# Altium PCB FU-AM-FU6861-B-025-HW-V1.0-20210601.pcbdoc (part 1 of 2)
Units mil, origin at the board's own origin, x right, y up, seen from the top; angles counter-clockwise.
Board outline 6000 x 4000 mil, 2 copper layers (Top Layer, Bottom Layer); 124 components, 51 nets, 325 pads, 278 vias.
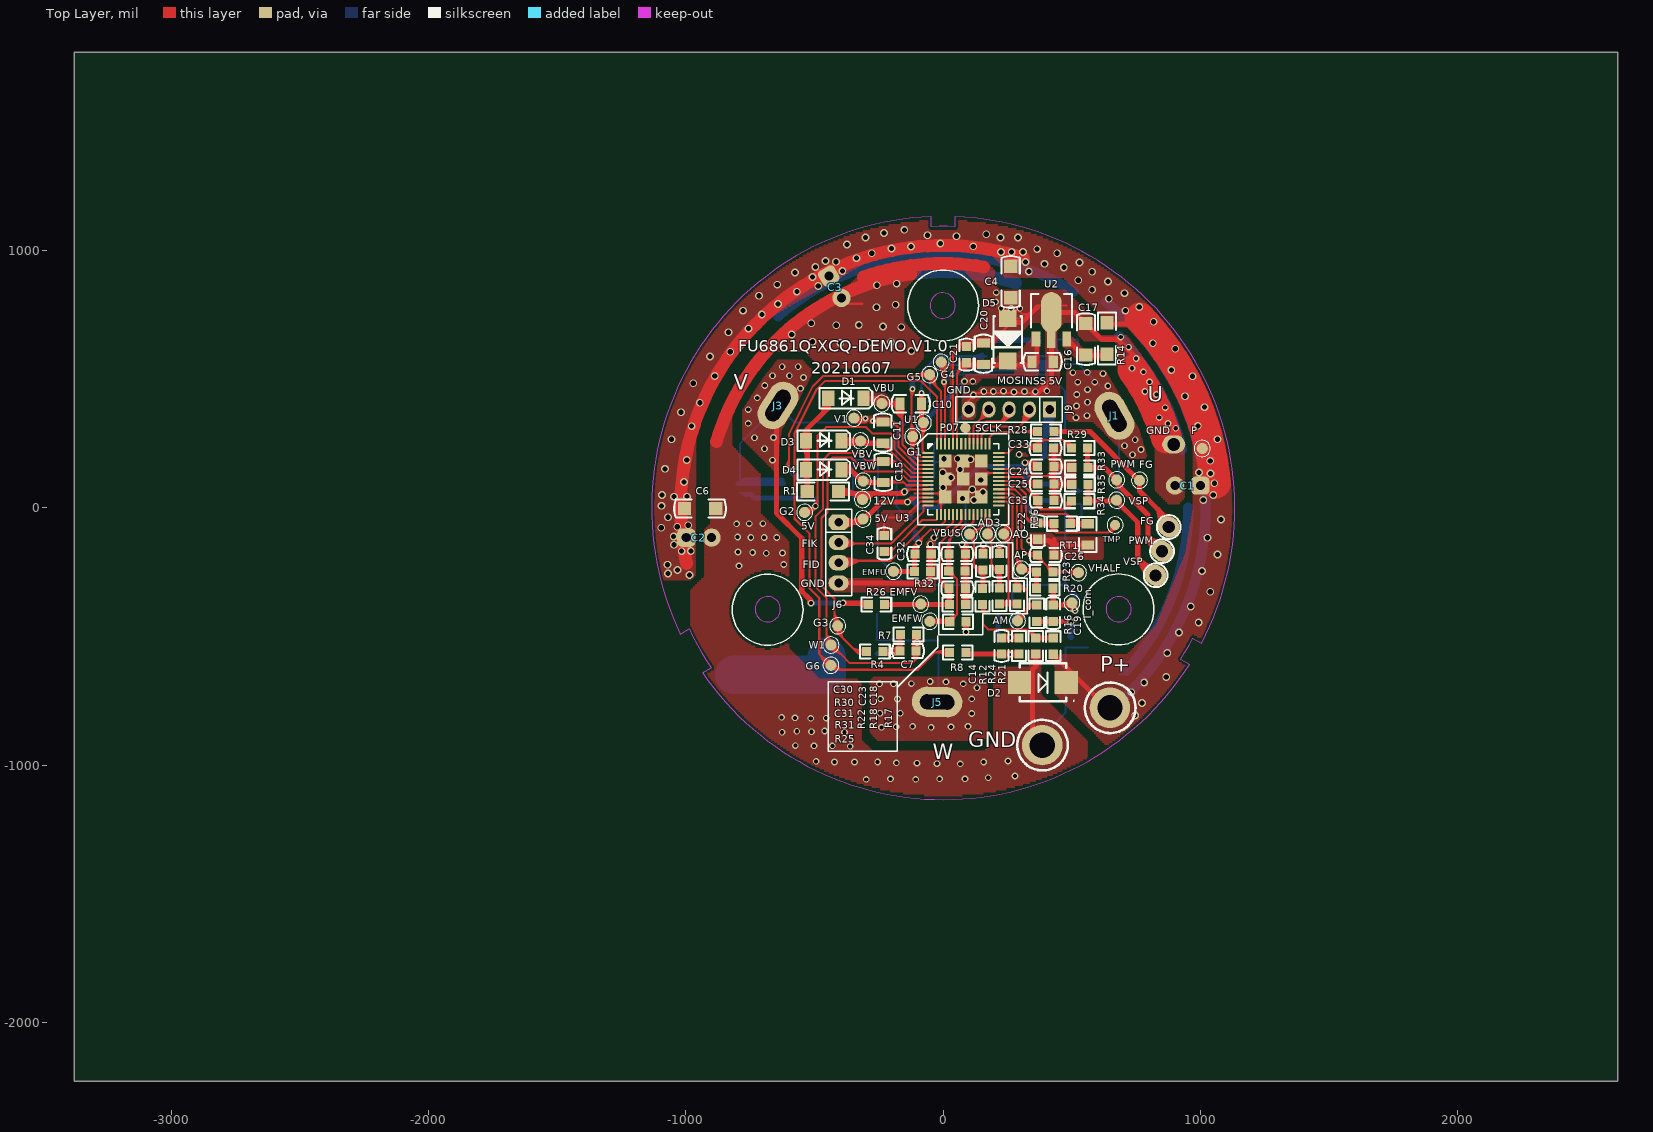
[diagram p0: Top Layer view]
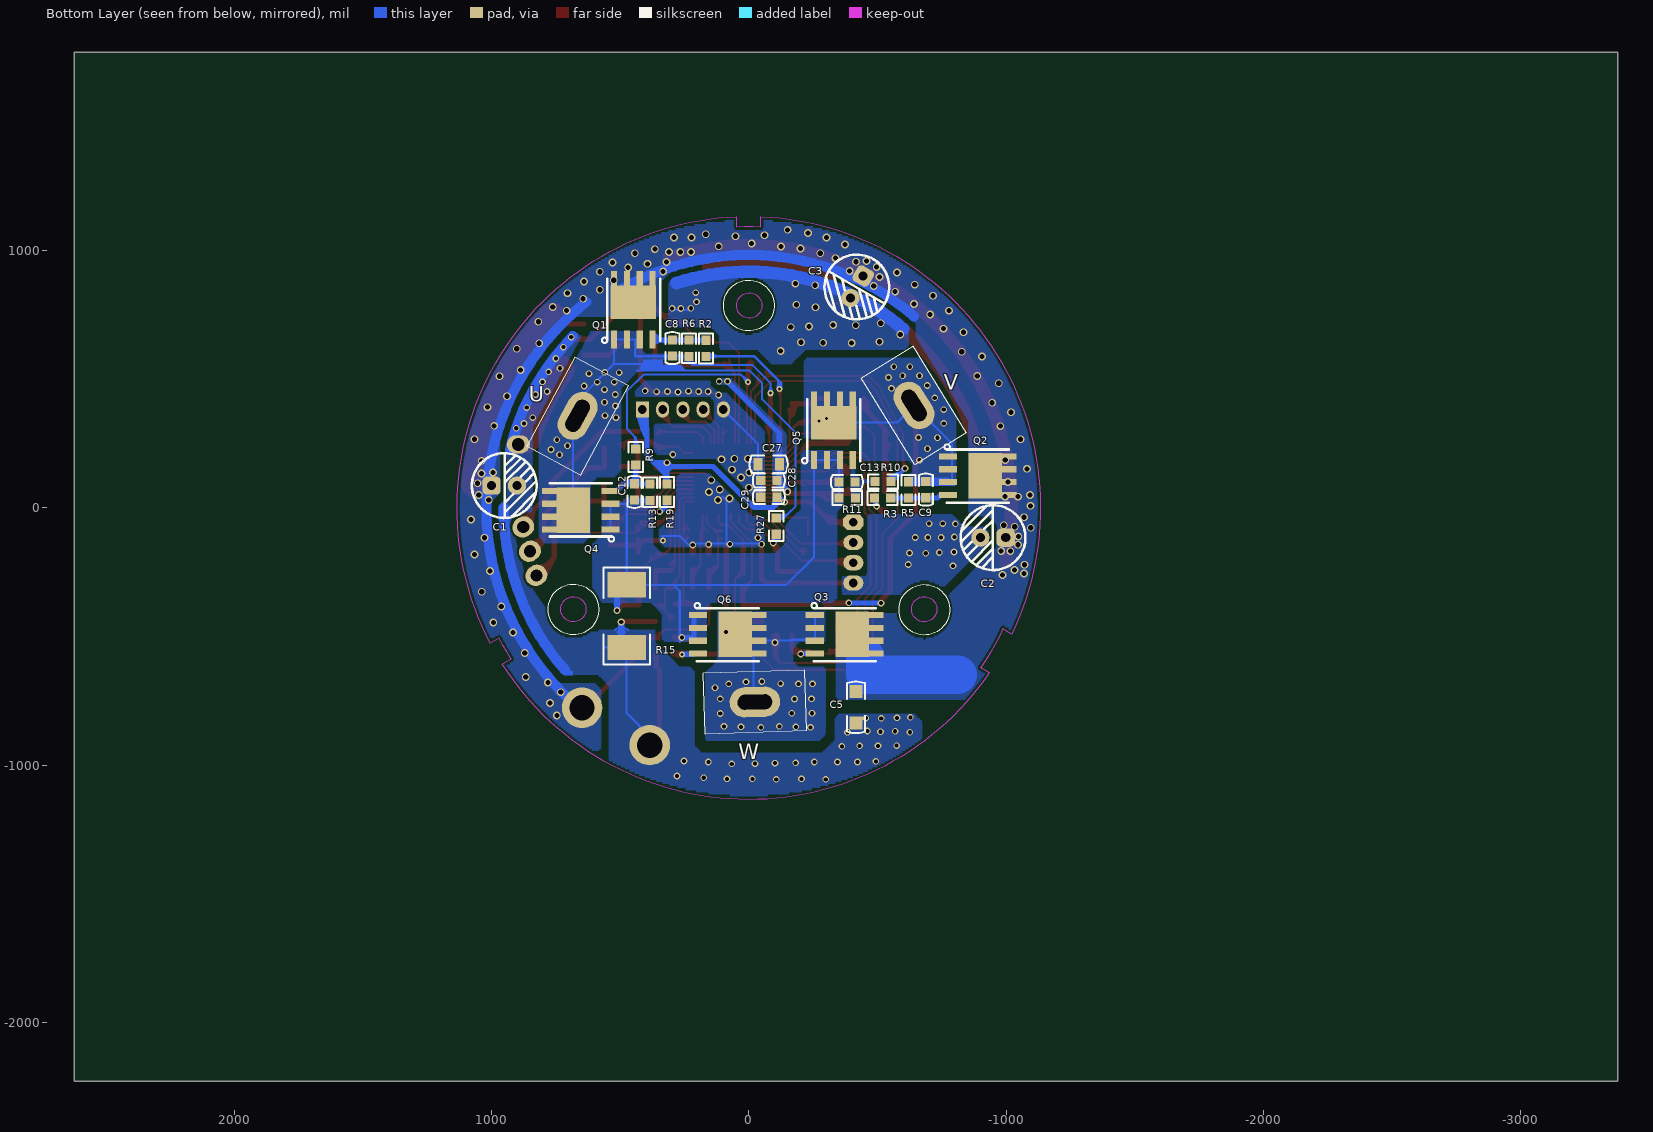
[diagram p1: Bottom Layer view, seen from below]

## Layer stack, top to bottom
Top Solder: solder mask 0.4, Solder Resist, Dk 3.5
Top Layer: signal copper 1.4
Dielectric1: dielectric 12.6, FR-4, Dk 4.8
Bottom Layer: signal copper 1.4
Bottom Solder: solder mask 0.4, Solder Resist, Dk 3.5

## Board outline
-3377.94,-2228.66 2622.06,-2228.66 2622.06,1771.34 -3377.94,1771.34

## Design rules (kind name [scope] priority, off if disabled: settings)
Clearance [All] p1: gap=7 ignorepadtopadclearanceinfootprint=FALSE except(0: Arc-Hole Track-Hole SMDPad-Hole THPad-Hole Via-Hole Fill-Hole Poly-Hole Region-Hole Text-Hole)
HoleToHoleClearance [All] p1: gap=7 allowstackedmicrovias=TRUE
MinimumSolderMaskSliver [All] p1: minsoldermaskwidth=4
PolygonConnect [All] p1: connectstyle=Direct reliefconductorwidth=10 reliefentries=4 polygonreliefangle="90 Angle" airgapwidth=10
RoutingVias [All] p1: holewidth=28 width=50 viastyle="Through Hole" minholewidth=28 minwidth=50 maxholewidth=28 maxwidth=50
SilkToSilkClearance [All] p1: silktosilkclearance=0
SilkToSolderMaskClearance SilkscreenOverComponentPads [IsPad] p1: minsilkscreentomaskgap=0 clearancetoexposedcopper=TRUE
SolderMaskExpansion [All] p1: expansion=4 istentingtop=FALSE
Width [All] p1: maxlimit=300 minlimit=7 preferedwidth=20
26 further rules are at their usual default settings.

## Components (designator, comment, footprint, x,y, rotation, side; value= is the part's Value field where it differs from the comment)
5V "" TP1.1#1 -311.91,-42.83 r0 top
12V "" TP1.1#1 -313.59,32.89 r90 top
AD3 "" TP1.1#1 171.84,-100.85 r90 top
AM "" TP1.1#1 288.7,-438.53 r0 top
AO "" TP1.1#1 235.14,-100.85 r0 top
AP "" TP1.1#1 304.76,-237.74 r0 top
C1 "180uF/35V" CAP2_5 953.19,86.06 r30 top locked
C2 "180uF/35V" CAP2_5 -952.32,-114.72 r210 top locked
C3 "180uF/35V" CAP2_5 -420.83,861.65 r150 top locked
C4 "CT106/50V" c1206 262.42,818.45 r90 top
C5 "CT106/50V" c1206 -416.39,-835.09 r90 bottom
C6 "CT106/50V" c1206 -885.38,-2.21 r180 top
C7 "1nf/50V" c0603 -107.04,-556.05 r180 top
C8 "1nf/50V" C0603 297.14,591.67 r90 bottom
C9 "1nf/50V" C0603 -687.99,100.93 r270 bottom
C10 "CT106/25V" c0805 -86.14,404.87 r180 top
C11 "CT106/25V" c0805 -234.27,332.89 r270 top
C12 "1nf/50V" c0603 443.81,32.82 r90 bottom
C13 "1nf/50V" C0603 -351.69,100.33 r180 bottom
C14 "1nf/50V" C0603 226.79,-506.72 r270 top
C15 "CT106/25V" c0805 -232.89,179.81 r270 top
C16 "106/25V" C0805 426.57,568.32 r180 top
C17 "105/50V" c1206 554.27,595.99 r90 top
C18 "105/16V" c0603 219.43,-238.42 r90 top
C19 "101/16V" c0603 427.61,-439.2 r90 top
C20 "106/25V" c0805 156.48,639.56 r270 top
C21 "104/25V" c0603 90.37,625.67 r270 top
C22 "104/16V" c0603 367.51,-119.94 r90 top
C23 "104/16V" c0603 154.51,-239.36 r90 top
C24 "105/16V" c0603 368.66,160.5 r0 top
C25 "105/16V" c0603 428.87,92.68 r180 top
C26 "105/16V" c0603 368.65,-183.6 r0 top
C27 "106/25V" c0805 -37.39,169.72 r180 bottom
C28 "104/25V" c0603 -107.78,107.12 r0 bottom
C29 "475/16V" c0603 -107.72,41.73 r0 bottom
C30 "101/16V" c0603 24.67,-178.71 r0 top
C31 "101/16V" c0603 24.81,-312.36 r0 top
C32 "101/16V" c0603 -48.29,-179.08 r180 top
C33 "101/16V" c0603 427.44,233.1 r180 top
C34 "475/16V" c0603 -229.02,-168.34 r90 top
C35 "104/16V" c0603 428.87,29.45 r180 top
D1 "LL4148" SOD-123 -448.3,426.11 r0 top
D2 "TVS_43V" "DO214AA, SMB" 387.49,-678.22 r180 top
D3 "LL4148" SOD-123 -534.49,261.19 r0 top
D4 "LL4148" SOD-123 -534.48,148.71 r0 top
D5 "TVS_18V" "DO214AC, SMA" 250.87,654.62 r90 top
EMFU "" TP1.1#1 -193.67,-246.4 r90 top
EMFV "" TP1.1#1 -87.26,-373.76 r90 top
EMFW "" TP1.1#1 -52.14,-440.69 r90 top
FG "" TP1.1#1 762.95,107.3 r0 top
FG "FG" tp 876.58,-73.91 r0 top (schematic designator J7)
G1 "" TP1.1#1 -118.87,277.22 r0 top
G2 "" TP1.1#1 -538.94,-17.26 r0 top
G3 "" TP1.1#1 -410.11,-458.22 r0 top
G4 "" TP1.1#1 -7.66,566.88 r0 top
G5 "" TP1.1#1 -52.9,518.3 r0 top
G6 "" TP1.1#1 -436.68,-611.62 r0 top
GND "" DY 384.99,-922.09 r0 top (schematic designator J4)
I_com "" TP1.1#1 500.16,-368.68 r90 top
J1 "U" AD#1 665.35,358.27 r87 top locked
J3 "V" AD#2 -642.33,398.22 r58 top
J5 "W" AD#3 -23.64,-754.58 r356 top
J6 "JTAG" SIP4-2 -406.46,-173.69 r270 top
J9 "CON5" SIP5-2 256.22,382.81 r180 top
P "" TP1.1#1 1007.06,231.06 r90 top
P+ "BAT+" DY 648.22,-776.89 r0 top (schematic designator J2)
PWM "" TP1.1#1 674.22,109.06 r90 top
PWM "PWM" tp 850.72,-168.4 r0 top (schematic designator J8)
Q1 "MXP4004SG" PQFQ5X6 451.65,798.22 r90 bottom
Q2 "MXP4004SG" PQFQ5X6 -917.74,127.96 r180 bottom
Q3 "MXP4004SG" PQFQ5X6 -400.6,-488.65 r180 bottom
Q4 "MXP4004SG" PQFQ5X6 680.77,-11.67 r0 bottom
Q5 "MXP4004SG" PQFQ5X6 -326.46,330.1 r90 bottom
Q6 "MXP4004SG" PQFQ5X6 53.65,-488.65 r180 bottom
R1 "10-1%" r1206 -528.53,63.89 r0 top
R2 "68R-1%" r0603#1 166.4,588.8 r90 bottom
R3 "68R-1%" r0603#1 -488.72,37.96 r180 bottom
R4 "68R-1%" r0603#1 -297.74,-558.37 r0 top
R5 "10K-1%" r0603#1 -620.23,101.89 r270 bottom
R6 "10K-1%" r0603#1 232.42,589.11 r90 bottom
R7 "10K-1%" r0603#1 -103.59,-491.33 r180 top
R8 "68R-1%" r0603#1 24.74,-561.95 r0 top
R9 "68R-1%" r0603#1 439.9,229.74 r270 bottom
R10 "68R-1%" r0603#1 -553.68,102.67 r0 bottom
R11 "10K-1%" r0603#1 -351.14,38.93 r180 bottom
R12 "10K-1%" r0603#1 293.86,-505.18 r270 top
R13 "10K-1%" r0603#1 383.03,29.35 r90 bottom
R14 "47R 1%" R1206 636.36,719.66 r270 top
R15 "1mR/3W-1%" r2512 474.64,-542.8 r90 bottom locked
R16 "1K-1%" r0603#1 363.18,-377.73 r270 top
R17 "10K-1%" r0603#1 287.54,-373.81 r90 top
R18 "10K-1%" r0603#1 218.84,-310.8 r270 top
R19 "10K-1%" r0603#1 318.72,93.1 r270 bottom
R20 "1K-1%" r0603#1 362.98,-312.79 r0 top
R21 "47K-1%" r0603#1 428.32,-569.11 r90 top
R22 "1K-1%" r0603#1 153.22,-375.71 r90 top
R23 "10K-1%" r0603#1 362.98,-248.8 r0 top
R24 "3.3K-1%" r0603#1 359.31,-504.95 r270 top
R25 "47K-1%" r0603#1 88.66,-442.13 r180 top
R26 "47K-1%" r0603#1 -291.83,-375.9 r0 top
R27 "47K-1%" r0603#1 -106.59,-38.88 r270 bottom
R28 "1K-1%" r0603#1 430.4,297.1 r180 top
R29 "1K-1%" r0603#1 561.26,233.67 r180 top
R30 "3.3K-1%" r0603#1 84.72,-244.4 r180 top
R31 "3.3K-1%" r0603#1 87.62,-375.37 r180 top
R32 "3.3K-1%" r0603#1 -112.28,-247.29 r0 top
R33 "10K-1%" r0603#1 499.35,156.15 r0 top
R34 "1K-1%" r0603#1 561.26,26.7 r180 top
R35 "10K-1%" r0603#1 499.35,91.39 r0 top
R36 "1K-1%" r0603#2 462.24,-61.03 r180 top
RT1 "47K-1%" r0805 561.73,-61.5 r270 top
TMP "" TP1.1#2 668.1,-66.35 r90 top locked
U1 "" TP1.1#1 -77.08,331.83 r0 top
U2 "78L12" SOT-89 360.42,656.7 r0 top
U3 "FU6861Q" QFN56 78,112 r0 top
V1 "" TP1.1#1 -347.23,349.01 r0 top
VBU "" TP1.1#1 -238.47,405.94 r0 top
VBUS "" TP1.1#1 102.17,-101.79 r90 top
VBV "" TP1.1#1 -321.15,260.51 r0 top
VBW "" TP1.1#1 -311.05,103.99 r0 top
VHALF "" TP1.1#1 525.55,-251.61 r90 top
VSP "" TP1.1#1 673.9,30.32 r90 top
VSP "VSP" tp 825.86,-261.98 r0 top (schematic designator J10)
W1 "" TP1.1#1 -436.36,-532.88 r0 top

## Footprints (in the part's own frame and the unit in brackets; to place one, negate y for a bottom-side part, rotate by r counter-clockwise, add the part's x,y. Pads: shape width x height; smd on the part's side, far side on the other; paste and mask are expansions set on the pad)
AD#1 [mm]
  oval 5x3 hole 1.5 slot 3.4 at 32 deg rot 32: 1(0,0)
AD#2 [mm]
  oval 5x3 hole 1.5 slot 3.4 at 0 deg: 1(0,0)
AD#3 [mm]
  oval 5x3 hole 1.5 slot 3.4 at 2 deg rot 2: 1(0,0)
c0603 [mm]
  rect 0.9x0.9 smd: 1(-0.04,0.001) 2(1.56,0.001)
  silkscreen extent -0.82,-0.69 2.34,0.69
C0603 [mm]
  rect 0.9x0.9 smd: 1(-0.04,0.001) 2(1.56,0.001)
  silkscreen extent -0.82,-0.69 2.34,0.69
c0805 [mm]
  rect 0.9x1.27 smd: 1(-0.034,0) 2(2.066,0)
  silkscreen extent -0.87,-0.86 2.9,0.86
C0805 [mm]
  rect 0.9x1.27 smd: 1(-0.034,0) 2(2.066,0)
  silkscreen extent -0.87,-0.86 2.9,0.86
c1206 [mm]
  rect 1.3x1.3 smd: 1(-0.026,0) 2(3.074,0)
  silkscreen extent -1.02,-0.89 4.07,0.89
CAP2_5 [mm]
  rrect50% 1.8x1.8 hole 0.9 rot 150: 1(1.032,-0.574)
  round 1.8 hole 0.9: 2(-1.133,0.676)
  body extent -4.43,-4.3 4.29,4.42, height 14
"DO214AA, SMB" [mm]
  rect 2.3x2.3 smd: 1(-2.3,0) 2(2.3,0)
  silkscreen extent -3.1,-1.87 2.3,1.88, body extent -2.64,-1.87 2.57,1.96, height 2.6
"DO214AC, SMA" [mm] "SODFL, 2-Leads, Body 2.56x5.14mm, IPC Medium Density"
  rect 1.68x1.68 smd: 1(-2.1,0) 2(2.1,0)
  silkscreen extent -2.79,-1.4 2.3,1.42, body extent -2.3,-1.42 2.3,1.42, height 2.5
DY [mm]
  round 4 hole 2.5: 1(0,0)
  silkscreen extent -2.47,-2.5 2.52,2.5
PQFQ5X6 [mm]
  rect 1.8x0.61 smd: 1(-3.651,1.837) 2(-3.651,0.567) 3(-3.651,-0.703) 4(-3.651,-1.973) 5(2.207,-1.973) 6(2.207,-0.703) 7(2.207,0.567) 8(2.207,1.837)
  rect 3.3x4.5 smd: 5(0.047,-0.079)
  silkscreen extent -3.98,-2.73 2.35,3.03, body extent -4.04,-2.72 2.59,2.49, height 1
QFN56 [mm]
  rect 1.27x1.27 smd: 0(-1.778,-1.778) 0(-1.778,0) 0(-1.778,1.778) 0(0,-1.778) 0(0,0) 0(0,1.778) 0(1.778,-1.778) 0(1.778,0) 0(1.778,1.778)
  rect 1.1x0.2 smd: 1(-3.5,2.6) 2(-3.5,2.2) 3(-3.5,1.8) 4(-3.5,1.4) 5(-3.5,1) 6(-3.5,0.6) 7(-3.5,0.2) 8(-3.5,-0.2) 9(-3.5,-0.6) 10(-3.5,-1) 11(-3.5,-1.4) 12(-3.5,-1.8) 13(-3.5,-2.2) 14(-3.5,-2.6) 29(3.5,-2.6) 30(3.5,-2.2) 31(3.5,-1.8) 32(3.5,-1.4) 33(3.5,-1) 34(3.5,-0.6) 35(3.5,-0.2) 36(3.5,0.2) 37(3.5,0.6) 38(3.5,1) 39(3.5,1.4) 40(3.5,1.8) 41(3.5,2.2) 42(3.5,2.6)
  rect 0.2x1.1 smd: 15(-2.6,-3.5) 16(-2.2,-3.5) 17(-1.8,-3.5) 18(-1.4,-3.5) 19(-1,-3.5) 20(-0.6,-3.5) 21(-0.2,-3.5) 22(0.2,-3.5) 23(0.6,-3.5) 24(1,-3.5) 25(1.4,-3.5) 26(1.8,-3.5) 27(2.2,-3.5) 28(2.6,-3.5) 43(2.6,3.5) 44(2.2,3.5) 45(1.8,3.5) 46(1.4,3.5) 47(1,3.5) 48(0.6,3.5) 49(0.2,3.5) 50(-0.2,3.5) 51(-0.6,3.5) 52(-1,3.5) 53(-1.4,3.5) 54(-1.8,3.5) 55(-2.2,3.5) 56(-2.6,3.5)
  silkscreen extent -4.5,-4.5 4.5,4.5
r0603#1 [mm]
  rect 0.9x0.9 smd: 1(0.005,0.01) 2(1.605,0.01)
  silkscreen extent -0.67,-0.69 2.28,0.71
r0603#2 [mm]
  rect 0.9x0.9 smd: 1(-0.8,0) 2(0.8,0)
  silkscreen extent -1.48,-0.7 1.48,0.7
r0805 [mm]
  rect 0.9x1.27 smd: 1(0,0) 2(2.1,0)
  silkscreen extent -0.69,-0.86 2.79,0.86
r1206 [mm]
  rect 1.3x1.3 smd: 1(0,0) 2(3.1,0)
  silkscreen extent -1.02,-0.89 4.12,0.89
R1206 [mm]
  rect 1.3x1.3 smd: 1(0,0) 2(3.1,0)
  silkscreen extent -1.02,-0.89 4.12,0.89
r2512 [mm]
  rect 2.5x3.8 smd: 1(0,0) 2(6.196,0)
  silkscreen extent -1.69,-2.29 7.91,2.31
SIP4-2 [mm]
  oct 1.5x2 hole 0.85: 1(-3,0)
  oval 1.5x2 hole 0.85: 2(-1,0) 3(1,0) 4(3,0)
  silkscreen extent -4.27,-1.27 4.27,1.27
SIP5-2 [mm]
  rect 1.3x1.6 hole 0.85: 1(-4,0)
  oval 1.3x1.6 hole 0.85: 2(-2,0) 3(0,0) 4(2,0) 5(4,0)
  silkscreen extent -5.27,-1.27 5.27,1.27
SOD-123 [mm]
  rect 1.2x1.5 smd: 1(0.028,0) 2(3.528,0)
  silkscreen extent -0.82,-1 4.38,1
SOT-89 [mm]
  rect 0.864x1.5 smd: 1(0,0) 3(3.048,0)
  rect 0.864x2 smd: 2(1.524,0.115)
  oval 2.032x4 smd: 2(1.524,2.63)
  silkscreen extent -0.51,1.13 3.56,4.43
tp [mm]
  oval 2x2.2 hole 1.2 rot 55: 1(0,0)
  silkscreen extent -1.17,-1.17 1.17,1.17
TP1.1#1 [mm]
  round 1.1 smd: 1(0,0)
  silkscreen extent -0.8,-0.8 0.8,0.8
TP1.1#2 [mm]
  round 1.016 smd: 1(0,0)
  silkscreen extent -0.8,-0.8 0.8,0.8

## Part data
5V 12V AD3 AM AO AP EMFU EMFV EMFW FG G1 G2 G3 G4 G5 G6 GND I_com P PWM TMP U1 V1 VBU VBUS VBV VBW VHALF VSP W1: library part Component_1
C1 C2 C3: library part CAPACITOR, "Capacitor"
C4 C5 C6 C7 C8 C9 C12 C13 C14: library part Cap, "YG-C1206K106-50V（10UF）-10%"
C10 C11 C15: library part CAP-CC(SMD), "Capacitor"
C16: library part "Cap Semi", "Capacitor (Semiconductor SIM Model)"
C17 C19 C20 C23 C24 C25 C26 C27 C29 C30 C31 C32 C33 C34 C35: library part CAP, "Capacitor"
C18: library part CAP
C21 C28: library part CAP-CC, "Capacitor"
C22: library part "CAP NP"
D1 D3 D4: library part DIODE, "Diode"
D2 D5: library part D1206
FG PWM VSP: library part CON1, "Connector"
J1 J3 J5 P+: library part ANTENNA, "Generic Antenna"
J6: library part CON4, "Connector"
J9: "Connector"
Q1 Q2 Q3 Q4 Q5 Q6: library part MOSFET-N
R1 R16 R17 R20 R23 R25 R26 R27 R30 R31 R32: library part RES(SMD)
R2 R3 R4 R8 R9 R10 R22 R28 R29 R33 R34 R35 R36: library part "Res Semi", "Semiconductor Resistor"
R5 R6 R7 R11 R12 R13: library part "Res Semi", "YG-R0603F2002(20KΩ)-1%"
R14: library part res1, "R0603F1001(1KΩ)-1%"
R15: library part R-RES/2
R18 R19: library part RES3
R21 R24: library part res1, "Resistor"
RT1: library part "Res Thermal", "Thermistor"
U2: library part VOLTREG, "78M12"

## Free pads (board coordinates)
  round 40 smd: 0(86,311)
  oval 90x70 hole 50: 0(896,247)

## Via types
v1: diameter 26, hole 16, Top Layer to Bottom Layer, tented both sides, 137 vias
v2: diameter 30, hole 20, Top Layer to Bottom Layer, tented both sides, 131 vias
v3: diameter 23.62, hole 11.81, Top Layer to Bottom Layer, tented both sides, 7 vias
v4: diameter 27.56, hole 15.75, Top Layer to Bottom Layer, tented both sides, 3 vias

## Nets (pads, with @x,y where several pads share a name; then routed paths per layer and width w, separated by ;. In a path a pad name is that pad's centre, name@x,y a point inside that pad or via, vN(x,y) a via of type N, cw(c..) or ccw(c..) an arc to the next point about the centre after c; other vN are vias at no path point)
+5V: 5V.1 C24.1 C29.1 J6.1 J9.1 R19.1 U3.12 U3.38 | length 2426.2
  Top Layer w8: v1@-147,28 -126.87,41.13 ; v1@-141.37,26.63 -126.87,41.13 ; v1@-134,26 -118,41.13 ; v1@-132,18 -107,41.13 ; U3.12@-59.8,41.13 -107,41.13 ; U3.38@215.8,151.37 331,151.37 ; v1@322,184 369,176 323,180 356,173 320,167 343,170 351,164 348.01,159.98 ; v1@329,176 351.59,176 C24.1@367.07,160.52 ; C24.1@349.37,151.37 342,151.37 ; C24.1@352,162 348.01,159.98 ; C24.1@354,147 331,151.37 ; C24.1@357.65,157.35 342.81,157.35 ; C24.1@358.85,151.37 342,151.37 ; C24.1@361.85,151.37 C24.1@367.07,156.59 ; -126.87,41.13 -118,41.13 ; -118,41.13 -107,41.13 ; 331,151.37 342,151.37 ; 331,151.37 342.81,157.35 ; 342.81,157.35 348.01,159.98
  Top Layer w20: J6.1@-406.46,-55.58 -351,-55.58 ; J6.1@-385,-74 -351,-55.58 ; J6.1@-379,-43 -351,-55.58 ; 5V.1@-323,-42 -351,-55.58 ; 5V.1@-320.34,-38.34 -300.34,-38.34 -284.5,-22.5 ; 5V.1@-311,-53 -324.66,-55.58 -351,-55.58 ; 5V.1@-311,-37 -284.5,-22.5 ; v1(-139,23) -239,23 -284.5,-22.5
  Bottom Layer w8: v1(-139,23) v1@-131.95,23
  Bottom Layer w20: C29.1@-117,32 -109.31,16.31 ; C29.1@-114,26 v1(-139,23) -120.29,41.71 C29.1@-109.31,41.71 -109.31,16.31 ; C29.1@-103,35 -100,13 -95,2 ; v1@316,176 301,161 ; 317,145 301,161 ; 317,153 341,171 ; R19.1@318.34,92.89 318.34,175.66 367.66,175.66 ; R19.1@324,98 324,132 367.66,175.66 ; J9.1@399,357 396,297 ; J9.1@399,366 413.7,314.7 ; 413,312 396,272 ; J9.1@413.7,382.81 413.7,314.7 ; J9.1@427,358 413.7,314.7 ; -109.31,16.31 -95,2 ; -95,2 -20,2 139,161 278.34,161 301,161 ; 367.66,175.66 396,204 396,272 ; 396,272 396,297 ; 396,297 413.7,314.7
  other v1: 318,176
+12V: 12V.1 C16.2 C20.2 C21.2 C27.2 C28.1 D5.1 R1.2 U2.1 U3.10 U3.51 | length 2000.8
  Top Layer w7.87: v4@-140.42,72.5 -131,72.5 U3.10@-59.81,72.5 ; U3.51@54.36,249.66 54.36,288
  Top Layer w8: v4@-153,52 -143,58 -131,72.5 ; v4@-151.91,61 v4(-149.98,62.93) -140.42,72.5 v4@-150,72 ; 54.36,288 54.36,464 ; 54.36,492.36 54.36,464 ; C21.2@77,577 54.36,521.36 ; C21.2@79,551 73.5,540.5 ; C21.2@80,566 54.36,521.36 ; C21.2@85.5,552.5 73.5,540.5 ; C21.2@107,552 65,532 ; 54.36,464 54.36,521.36 ; 54.36,521.36 65,532 ; 65,532 73.5,540.5
  Top Layer w20: R1.2@-406.49,63.89 -399.34,56.75 -349,56.75 ; R1.2@-387,72 -349,56.75 ; 12V.1@-320,37 -349,56.75 ; 12V.1@-305,33 -271,56.75 ; v4@-154,65 -171,56.75 ; v4@-151.91,61 -156.17,56.75 -171,56.75 ; C21.2@85.5,552.5 93.83,560.83 98.46,556.2 250.87,556.2 356.73,556.2 364.36,563.83 U2.1@364.36,644.89 ; -349,56.75 -271,56.75 ; -271,56.75 -171,56.75
  Bottom Layer w20: v4(-149.98,62.93) -149.98,66.47 -130.73,85.73 ; C28.1@-120,114 -130.73,85.73 ; C28.1@-104,99 -130.73,85.73 ; v1(83,492) -118.73,290.27 C27.2@-118.73,169.72 -118.73,97.73 -130.73,85.73
  other v1: 115,492
AD3: AD3.1 C18.1 R18.1 U3.28 | length 466.7
  Top Layer w8: AD3.1@163,-92 180.36,-68 ; AD3.1@175,-115 188,-133 ; U3.28@180.36,-25.79 180.36,-68 ; AD3.1@188,-96 180.36,-68 ; AD3.1@189,-104 188,-123 ; C18.1@208,-233 192.5,-228.5 ; C18.1@211.7,-247.7 192.5,-228.5 ; 212,-262 188,-224 ; 180.36,-68 180.36,-115.36 188,-123 ; 188,-224 188,-133 ; 188,-224 192.5,-228.5 ; 188,-133 188,-123
  Top Layer w20: R18.1@219.4,-310.83 C18.1@219.4,-240
AMP0M: AM.1 R16.1 R17.2 U3.31 | length 880.5
  Top Layer w8: U3.31@215.8,41.13 257.87,41.13 270,29 270,-268 282.5,-280.5 ; R17.2@280,-302 282.5,-280.5 ; AM.1@289,-421 310,-416 ; AM.1@290.06,-435.94 310,-416 ; R17.2@300,-297 287.16,-285.16 ; R17.2@301,-318 321,-314 ; R17.2@302,-301 317.61,-310.61 ; AM.1@304,-438 316.5,-409.5 ; 313,-315 325,-324 ; 342,-384 334.95,-391.05 ; R16.1@349,-370 331,-377 321,-402 323.88,-390.47 ; R16.1@350,-385 338,-383 323.88,-390.47 ; R16.1@363.57,-377.95 334.95,-377.95 ; 282.5,-280.5 287.16,-285.16 ; 287.16,-285.16 R17.2@287.16,-310.61 317.61,-310.61 ; 310,-416 316.5,-409.5 ; 316.5,-409.5 334.95,-391.05 ; 317.61,-310.61 321,-314 ; 321,-314 325,-318 325,-324 ; 323.88,-390.47 325,-386 325,-368 ; 325,-368 334.95,-377.95 ; 325,-368 325,-324 ; 334.95,-391.05 334.95,-377.95
AMP0O: AO.1 R17.1 R18.2 U3.30 | length 691.7
  Top Layer w8: U3.30@215.8,25.39 245.61,25.39 253,18 253,-57 ; R18.2@233,-364 244,-364 253,-353 ; AO.1@234,-115 253,-136 ; AO.1@239,-110 253,-129 ; 241.93,-370.07 253,-359 ; AO.1@245,-90 253,-67 ; 247,-73 229,-89 253,-57 ; R17.1@277,-363 257,-363 253,-359 ; 253,-359 253,-353 ; 253,-353 253,-136 ; 253,-136 253,-129 ; 253,-129 253,-67 ; 253,-67 253,-57
  Top Layer w20: R18.2@219.22,-374.01 R17.1@286.75,-374.01
AMP0P: AP.1 R20.1 R23.1 U3.32 | length 585.5
  Top Layer w8: U3.32@215.8,56.88 268.12,56.88 287,38 287,-197 ; AP.1@288,-233 287,-197 ; AP.1@302,-224 290,-208 ; AP.1@304.76,-242.42 299.42,-242.42 290,-233 290,-208 ; AP.1@311,-223 290,-200 ; R23.1@358.51,-248.42 R23.1@363.19,-248.42 ; 287,-197 290,-200 ; 290,-208 290,-200
  Top Layer w20: AP.1@302.76,-243.74 R23.1@356.51,-243.74 ; R20.1@363.19,-312.4 R23.1@363.19,-242.42
CMP0M: C30.1 EMFW.1 R25.2 R30.2 U3.24 | length 826.4
  Top Layer w8: R30.2@12,-257 46.37,-269.63 ; C30.1@12,-165 23.08,-124.92 ; R25.2@13,-431 54,-413.97 ; C30.1@16,-168 23.08,-139 ; R25.2@19.4,-448.57 R25.2@25.46,-442.51 45.49,-422.49 ; R30.2@21.52,-244.78 43.37,-266.63 ; C30.1@21.52,-180.25 C30.1@21.52,-178.68 ; C30.1@23.08,-178.68 23.08,-139 ; C30.1@31,-167 25,-140 28,-120 ; R30.2@33,-246 43.37,-266.63 ; R25.2@34,-443 45.49,-422.49 ; U3.24@117.37,-25.8 117.37,-54.63 106.69,-65.31 82.69,-65.31 28,-120 ; 23.08,-139 23.08,-124.92 ; 23.08,-124.92 28,-120 ; 43.37,-266.63 46.37,-269.63 ; 45.49,-422.49 54,-413.97 ; 46.37,-269.63 54,-277.26 54,-413.97
  Top Layer w20: EMFW.1@-52.14,-440.69 R25.2@23.63,-440.69 ; R30.2@21.52,-244.78 C30.1@21.52,-180.25
CMP0P: C32.2 EMFU.1 R27.2 R32.1 U3.19 | length 594.4
  Top Layer w8: EMFU.1@-176,-245.35 -170.05,-245.35 ; C32.2@-101,-169 -98,-153 -87,-140 -87,-121 ; v1@-101,-129 -82.54,-114.97 ; v1@-98.5,-132.5 -49,-83 11,-83 38.63,-55.37 U3.19@38.63,-25.8 ; v1@-86,-139 -82.54,-114.97 ; -76,-110 -82.54,-114.97
  Top Layer w20: EMFU.1@-193.67,-246.4 R32.1@-112.57,-246.4 ; R32.1@-112.07,-246.9 -112.07,-153.07 v1(-95,-136)
  Bottom Layer w20: R27.2@-114,-114 -106.97,-124.03 ; R27.2@-106.97,-94.21 -106.97,-124.03 ; R27.2@-101,-113 v1(-95,-136) -106.97,-124.03
CMP1PS: C31.1 EMFV.1 R26.2 R31.2 U3.21 | length 982.5
  Top Layer w8: R26.2@-212.87,-375.52 R31.2@24.18,-375.52 ; C31.1@17,-330 -7.89,-287.09 ; C31.1@21,-299 -7.89,-287.09 ; C31.1@24.41,-316.41 23.22,-315.22 -12,-280 ; U3.21@70.13,-25.8 70.13,-52.87 -12,-135 -12,-280 ; -12,-280 -7.89,-287.09
  Top Layer w20: R26.2@-228.39,-375.75 R31.2@24.41,-375.75 23.22,-374.56 23.22,-315.22 C31.1@23.22,-312.34
FG: R28.2 U3.43 | length 323
  Top Layer w8: U3.43@180.36,249.8 180.36,274.36 201,295 314,295 ; R28.2@354,287 325,295 ; R28.2@354,304 325,295 ; R28.2@354,307 314,295 ; R28.2@364.2,285.72 354.92,295 325,295 ; 314,295 325,295
FICED: J6.3 U3.17 | length 745.6
  Top Layer w8: J6.3@-390,-191 -328,-205.18 ; J6.3@-389,-192 -351,-205.18 ; J6.3@-386.78,-205.18 -351,-205.18 ; J6.3@-381,-224 -328,-205.18 ; J6.3@-380,-232 -324,-205.18 ; J6.3@-376,-214 -337,-205.18 ; U3.17@7.13,-25.8 7.13,-51.87 -7,-66 -66,-66 -205.18,-205.18 -324,-205.18 ; -351,-205.18 -337,-205.18 ; -337,-205.18 -328,-205.18 ; -328,-205.18 -324,-205.18
FICEK: J6.2 U3.14 | length 578.1
  Top Layer w8: J6.2@-389,-158 -339,-139 ; J6.2@-386.03,-139 -339,-139 ; J6.2@-380,-128 -339,-139 ; J6.2@-378,-119 -339,-139 ; J6.2@-376,-146 -339,-139 ; U3.14@-59.8,9.64 -76.36,9.64 -76.36,-12.36 -203,-139 -339,-139
GND: C1.2 C2.2 C3.2 C4.1 C5.1 C6.1 C16.1 C17.2 C18.2 C19.1 C20.1 C21.1 C22.1 C23.2 C24.2 C25.1 C26.2 C27.1 C28.2 C29.2 C30.2 C31.2 C32.1 C33.1 C34.2 C35.1 D2.2 D5.2 GND.1 J6.4 J9.5 pad.0@896,247 R15.1 R16.2 R24.2 R30.1 R31.1 R32.2 R33.1 R35.1 RT1.2 U2.2 U3.0 U3.11 U3.13 U3.16 U3.37 U3.52 | length 10586.5
  Top Layer w7.87: -110.99,56.75 U3.11@-59.81,56.75 ; -106.62,6 -87.37,25.25 U3.13@-59.81,25.25 ; U3.11@-62.02,56.77 U3.0@-9.11,56.77 ; U3.13@-60.02,25.28 U3.0@-8.84,25.28 ; U3.16@-8.84,-26.91 -8.84,24.28 7.77,40.89 U3.0@-7.11,55.77 ; U3.52@38.61,249.66 38.61,338.65 ; U3.0@150.78,115.05 174.4,138.67 ; U3.0@171.61,135.49 U3.37@215.78,135.49
  Top Layer w8: C3.2@-421.56,809.71 -405.66,793.81 -313.23,793.81 ; J6.4@-410.4,-291.8 J6.4@-406.46,-291.8 ; C34.2@-230.68,-105.29 -230.68,-36.36 -148.98,-36.36 -106.62,6 ; v1@-41,-146.08 v1@-41,-138 ; 38.61,338.65 38.61,534 ; 38.61,553.61 38.61,534 ; R31.1@87.4,-375.75 R31.1@87.4,-372.86 ; 87.4,-145 87.4,-137.6 ; J9.5@98.74,382.81 98.74,416.74 128,446 v1@347,446 ; C20.1@141.58,643.01 79,643.01 38.61,602.62 38.61,534 ; C23.2@154.48,-177.96 C23.2@154.48,-176.44 ; 186.14,643.01 194.01,650.88 D5.2@257.78,714.65 ; U3.37@215.8,135.62 319.38,135.62 330,125 ; D5.2@234.19,770.18 292.79,770.18 309.93,753.05 338.05,753.05 ; D5.2@279.21,736.08 298.11,736.08 ; 333,125 430.06,125 ; 365.28,780.28 372.79,787.79 421.48,787.79 479.48,787.79 ; C33.1@429.03,231.66 C33.1@429.03,233.08 ; R33.1@495.57,156.59 R33.1@499.57,156.53 ; C1.2@901.24,59.76 C1.2@901.24,86.8 C1.2@901.24,65.76
  Top Layer w20: J6.4@-406.46,-291.8 -338,-291.8 -65,-291.8 -49.08,-275.87 R32.2@-49.08,-246.9 v1@-49.08,-146.08 ; R31.1@87.4,-375.75 87.4,-312.34 87.4,-145 ; C20.1@141.58,650.88 194.01,650.88 ; D5.2@250.87,721.55 306.55,721.55 338.05,753.05 365.28,780.28 ; v3(334.15,-126.8) 409.8,-126.8 424.06,-141.06 427.18,-144.18 RT1.2@538.11,-144.18 ; GND.1@347,-884.1 347,-628 359.69,-615.31 R24.2@359.69,-568.16 ; v1@347,446 367,446 420.42,499.42 U2.2@420.42,661.23 U2.2@420.42,760.23 511.05,760.23 C17.2@554.27,717.01 615.28,656 678,656 v1@750,584 ; R16.2@363.57,-440.94 v4@493.88,-440.94 ; C26.2@430.06,-173.64 430.06,-123.06 ; C24.2@430.06,160.52 C24.2@430.45,160.52 ; C35.1@430.45,29.43 C25.1@430.45,92.66 ; C33.1@430.45,231.66 C24.2@430.45,160.52 ; R33.1@495.57,160.52 C24.2@430.45,160.52 ; R35.1@498.68,92.66 C25.1@430.45,92.66 ; C25.1@430.45,92.66 C24.2@430.45,160.52
  Top Layer w25: C23.2@156,-176.44 v1(156,-142) ; C18.2@218,-175.61 v1(218,-144)
  Top Layer w50: -881.36,257.91 cw(c0,0) -126.16,909.62 ; -309.85,898.27 cw(c0,0) 156.7,937.19
  Top Layer w120: v1@737.51,537.08 cw(c0,9) pad.0@868.36,271.18
  Bottom Layer w7.87: 470.45,-473.56 495.45,-458.56 480.45,-483.56 ; 510.6,-483.71 495.76,-458.96 495.6,-458.71 495.76,-458.8 520.6,-473.71
  Bottom Layer w8: C29.2@-46.32,45.64 C28.2@-46.32,107.04 ; v1@-41,-138 v1@212,-138 ; C28.2@-36.05,117.42 -36.05,143 C27.1@-36.05,169.72 ; v2@6.9,177.82 -27.95,177.82 C27.1@-36.05,169.72 ; 87.4,-137.6 87.4,29.97 101.39,43.96 ; J9.5@98.74,382.81 -36.05,248.02 C27.1@-36.05,169.72 ; v1(218,-144) 233.95,-144 269.15,-108.8 340.15,-108.8 ; v1@234.19,770.18 v1@288.76,770.18 ; GND.1@392.86,-878.78 474.64,-797 R15.1@474.64,-542.8 561.8,-542.8
  Bottom Layer w23.62: R15.1@495.76,-501.71 495.76,-458.96 495.76,-458.8 v4(495.76,-442.81)
  Bottom Layer w40: v1@683.79,667.36 cw(c0,0) pad.0@928.38,225.94 ; 712.91,-632.03 ccw(c0,0) 952.73,1.01
  Bottom Layer w50: -599.09,695.99 cw(c0,0) 281.37,874.16
  other v1: -299,-1055 -107,-1055 -205,-1053 -14,-1053 85,-1053 175,-1049 279,-1042 66,-995 -24,-994 -102,-992 -182,-991 -423,-988 -345,-988 -255,-988 157,-988 -494,-985 252,-984 -362,-927 -502,-925 -431,-925 -575,-924 -626,-872 -384,-872 -512,-870 -569,-868 -461,-867 -515,-818 -455,-817 -576,-816 -628,-814 -794,-225 -620,-220 -688,-176 -625,-175 -741,-173 -798,-171 -50,-141 73.4,-140.6 -36,-116 -748,-115 -696,-115 -647,-115 -799,-113 -803,-62 -754,-61 -701,-61 295,208 904,310 874,328 840,351 863,390 117,439 829,441 275,451 358,452 158,453 195,453 316,453 784,453 234,454 403,455 802,490 778,529 734,543 750,581 721,625 690,664 264,775 225.19,776.18 298,776 203,801 206,837
  other v2: 120,31 75,37 155,62 113,72 -1,79 146,108 30,118 -2,138 65,149 106,189 3,191 56,191 -124,610 -400,641 -289,642 -203,644 -508,646 -589,674 -163,703 -234,705 -416,710 -328,711 -513,718 -259,780 -185,790 -258,866 -181,872
HOU: G1.1 R2.1 U3.2 | length 1090.6
  Top Layer w7.87: -99.26,210.37 -87.37,198.48 U3.2@-59.81,198.48
  Top Layer w8: G1.1@-132,268 -122.8,233.91 ; G1.1@-132,281 -122.8,322 ; v3@-127,460 -122.8,435 ; v3@-122.8,451 -122.8,435 ; G1.1@-120,262 -116.06,237.99 ; G1.1@-114,293 -122.8,317 ; v3@-113,459 -122.8,431 ; G1.1@-112,272 -116.06,237.99 ; G1.1@-105,265 -116.06,237.99 ; G1.1@-104,285 -122.8,327 ; -99.26,210.37 -113.94,225.06 ; -122.8,233.91 -113.94,225.06 ; -122.8,233.91 -122.8,317 ; -122.8,317 -122.8,322 ; -122.8,322 -122.8,327 ; -122.8,327 -122.8,431 ; -122.8,431 -122.8,435 ; -116.06,237.99 -113.94,225.06
  Bottom Layer w10: v3@-125.68,463.84 -125.68,485.32 -119.5,491.5 ; v3@-120,464 -119.5,491.5 ; v3@-113,461 -114,497 ; R2.1@154,580 120,589.01 ; R2.1@154,599 120,589.01 ; R2.1@166.78,589.01 120,589.01 ; -119.5,491.5 -114,497 ; -114,497 -21.99,589.01 120,589.01
  other v3: -119.68,461.84
HOV: G2.1 R3.1 U3.5 | length 961.3
  Top Layer w7.87: -189.73,229.98 -110.99,151.24 U3.5@-59.81,151.24
  Top Layer w8: G2.1@-538.94,-17.26 G2.1@-521.26,-17.26 ; v1@-500,12 -489,27 ; v1@-489,11 -489,20 ; v1@-488,10 -489,20 ; -189.73,229.98 -189.73,274.73 -205,290 -276,290 -300,314 -455,314 -489,280 -489,66 -489,27 ; -489,20 -489,27
  Top Layer w20: G2.1@-534,-8 -511.5,-7.5 ; G2.1@-521.26,-17.26 -511.5,-7.5 ; v1(-497,7) -511.5,-7.5
  Bottom Layer w20: R3.1@-494,26 v1(-497,7) -492.87,11.13 R3.1@-492.87,38.34
HOW: G3.1 R4.1 U3.8 | length 1549.8
  Top Layer w7.87: -123,103.99 U3.8@-59.81,103.99
  Top Layer w8: G3.1@-411,-474 -402.38,-494.38 ; G3.1@-411,-447 -423,-421 ; G3.1@-404,-443 -423,-413 ; G3.1@-403,-472 -396.38,-500.38 ; G3.1@-397,-465 -393.38,-503.38 ; R4.1@-313,-569 -330.91,-565.86 ; R4.1@-313,-548 -328,-552 -350.38,-546.38 ; R4.1@-311,-561 -335.88,-560.88 ; R4.1@-310,-555 -340.38,-556.38 ; R4.1@-293.59,-565.86 -330.91,-565.86 ; -123,103.99 -134.61,103.99 -172.62,142 -304,142 -358,196 -429,196 -450,175 -450,-16 -473.2,-39.2 -473.2,-302.8 -423,-353 -423,-413 ; -423,-421 -423,-473.76 -402.38,-494.38 ; -423,-421 -423,-413 ; -402.38,-494.38 -396.38,-500.38 ; -396.38,-500.38 -393.38,-503.38 ; -393.38,-503.38 -350.38,-546.38 ; -350.38,-546.38 -340.38,-556.38 ; -340.38,-556.38 -335.88,-560.88 ; -335.88,-560.88 -330.91,-565.86
I_SHUNT: C12.1 C13.1 C14.1 C19.2 I_com.1 Q4.1 Q4.2 Q4.3 Q5.1 Q5.2 Q5.3 Q6.1 Q6.2 Q6.3 R11.1 R12.1 R13.1 R15.2 R20.2 | length 2742.9
  Top Layer w8: R20.2@426.18,-313.8 R20.2@426.18,-312.4
  Top Layer w20: C14.1@227.95,-504 v1(260,-504) R12.1@292.84,-504 ; R20.2@427.58,-313.8 C19.2@427.58,-377.8 466,-377.8 ; v4(512.24,-398.19) 491.85,-377.8 466,-377.8 ; v4@514,-398 509,-376 493,-364 466,-377.8
  Bottom Layer w8: Q5.3@-354.12,186.37 Q5.1@-254.12,186.37 -254.12,-190.88 -146.14,-298.86 293.14,-298.86 ; R11.1@-351.36,39.31 Q5.3@-351.36,183.6 ; 268.25,-520.25 268.25,-323.75 293.14,-298.86 ; R13.1@380.41,29.57 R13.1@383.41,29.57 ; C12.1@442.16,29.57 462.88,29.57 474.45,18 ; R15.2@474.45,-298.66 474.45,18 ; R15.2@474.64,-298.86 293.14,-298.86 ; Q4.1@537.04,-84.01 537.04,12.05 533.1,15.99 476.46,15.99 474.45,18
  Bottom Layer w20: Q6.3@213.13,-516.31 Q6.1@213.13,-416.31 ; 215.13,-504 v1(260,-504) ; R13.1@383.41,29.57 C12.1@442.16,29.57
  Bottom Layer w23.62: R15.2@472.87,-299.92 R15.2@512.24,-339.29 ; v4@512.24,-393.04 512.24,-350.29
LOU: G4.1 R9.1 U3.54 | length 1272.1
  Top Layer w7.87: U3.54@7.13,249.8 7.12,279
  Top Layer w8: v3@-3,484 7.12,468 ; 7.12,279 7.12,456 ; v3@7.12,484.62 7.12,468 ; v3@10,488 7.12,456 ; 7.12,456 7.12,468
  Top Layer w20: G4.1@-13,564 3,530 ; G4.1@-7.66,566.88 3,556.22 3,530 ; v3@3,493 3,530
  Bottom Layer w8: v3@-1,496 31,518 ; v3(2.37,489.37) 20,507 ; v3@9,487 20,507 ; R9.1@430,240 439.52,273.52 ; R9.1@439.52,240.52 439.52,273.52 ; R9.1@447,241 443,263 443.5,277.5 ; 20,507 31,518 ; 31,518 408,518 409,517 411,517 473,455 473,307 443.5,277.5 ; 439.52,273.52 443.5,277.5
LOV: G5.1 R10.1 U3.55 | length 1449.2
  Top Layer w7.87: U3.55@-8.63,249.66 -8.63,281.16
  Top Layer w8: -602,170 -613,159 -600,187 ; v1@-600,154 -600,187 ; G5.1@-65,525 -95,513 ; G5.1@-64,531 -106,513 ; G5.1@-60,506 -82,513 ; G5.1@-45,503 -34.5,479.5 ; G5.1@-39,514 -31.84,487.31 ; G5.1@-36,517 -31.84,487.31 ; -8.63,281.16 -8.63,453.63 -28,473 ; -600,187 -600,288 -509,470 -466,513 -106,513 ; -106,513 -95,513 ; -95,513 -82,513 ; -82,513 -68,513 -34.5,479.5 ; -34.5,479.5 -28,473 ; -31.84,487.31 -28,473
  Bottom Layer w20: v1(-607,154) -605.17,154 -585.09,133.91 ; R10.1@-553.46,102.29 -585.09,133.91 ; R10.1@-546,113 -585.09,133.91
LOW: G6.1 R8.1 U3.56 | length 2728.5
  Top Layer w7.87: U3.56@-24.38,249.66 U3.56@-24.38,269.35
  Top Layer w8: -578,-26 -578,6 ; -578,291 -578,290.78 ; G6.1@-438,-596 -460,-592 -449,-624 -482,-566.3 ; G6.1@-434,-628 -419.3,-629 ; G6.1@-431,-597 -466.65,-581.65 ; G6.1@-426,-615 -405,-629 ; G6.1@-419,-609 -399,-629 ; U3.56@-24.36,249.8 -24.36,432 -85.36,493 -460,493 -490,463 -578,290.78 ; R8.1@9,-570 0,-558 13,-551 -20.71,-558.99 ; R8.1@11,-573 -20.71,-558.99 ; R8.1@24.95,-561.56 -31.56,-561.56 ; -578,6 -578,290.78 ; -578,6 -578,-41 -519,-100 -519,-313 -482,-350 -482,-566.3 ; -482,-566.3 -466.65,-581.65 ; -466.65,-581.65 G6.1@-436.68,-611.62 -419.3,-629 ; -419.3,-629 -405,-629 ; -405,-629 -399,-629 ; -399,-629 -99,-629 -31.56,-561.56 ; -31.56,-561.56 -20.71,-558.99
MOSI: J9.3 U3.46 | length 299.8
  Top Layer w8: U3.46@133.12,249.8 133.12,301.12 167,335 224,335 ; J9.3@238,372 233.7,346.26 ; J9.3@249,364 233.7,346.26 ; J9.3@253.03,357.03 231,335 ; J9.3@265,358 231,335 ; 224,335 231,335 ; 224,335 233.7,346.26
NetC7_2: C7.2 Q3.4 R4.2 R7.2 | length 273.4
  Top Layer w8: R7.2@-166.79,-493.36 R7.2@-166.79,-491.71
  Top Layer w20: C7.2@-181,-561 -202,-571 R4.2@-234.53,-557.98 v1@-195,-557.98 ; C7.2@-170.36,-557.98 v1@-195,-557.98 ; -169,-537 -182,-550 v1@-195,-557.98 ; C7.2@-168.45,-556.07 R7.2@-168.45,-493.36
  Bottom Layer w20: Q3.4@-256.87,-566.31 v1@-203.93,-566.31
  other v1: -202.24,-568
NetC8_2: C8.2 Q1.4 R2.2 R6.2 | length 267.1
  Bottom Layer w20: R2.2@166.78,652 343,652 ; Q1.4@368,671 343,652 ; Q1.4@371.51,652 343,652 ; Q1.4@372,641 343,652
NetC9_2: C9.2 Q2.4 R3.2 R5.2 | length 233.4
  Bottom Layer w8: Q2.4@-789.76,58.17 Q2.4@-774.01,58.17
  Bottom Layer w20: Q2.4@-767.84,52 -747,52 -733.34,38.34 R3.2@-555.87,38.34
NetC12_2: C12.2 Q4.4 R9.2 R13.2 | length 316.9
  Bottom Layer w8: R13.2@380.41,92.56 R13.2@383.41,92.56 ; Q4.4@526,65.99 Q4.4@537.04,65.99
  Bottom Layer w20: R13.2@383.41,92.56 487.44,92.56 514.01,65.99 Q4.4@526,65.99 ; 426,95 439.52,119 ; C12.2@439.52,98.54 439.52,119 ; R9.2@439.52,166.53 439.52,119 ; 485,94 450,106 439.52,119
NetC13_2: C13.2 Q5.4 R10.2 R11.2
NetC14_2: C14.2 Q6.4 R8.2 R12.2 | length 289.3
  Top Layer w8: C14.2@211.61,-568.39 C14.2@227.08,-568.39
  Top Layer w20: R8.2@94.5,-568.12 C14.2@226.81,-568.12 ; C14.2@227.08,-568.39 R12.2@294.24,-568.39
  Bottom Layer w8: Q6.4@185.57,-566.31 Q6.4@197.38,-566.31 Q6.4@215.86,-566.31
  Bottom Layer w20: Q6.4@215.86,-569.04 v3(259.96,-569.04)
NetC17_1: C17.1 R14.2 U2.3 | length 186
  Top Layer w20: U2.3@480.42,656.7 543.45,593.68 R14.2@640.29,593.68
NetC25_2: C25.2 U3.36 | length 242.8
  Top Layer w8: U3.36@215.8,119.87 307.13,119.87 321.5,105.5 ; 337.34,92.66 C25.2@367.46,92.66 ; C25.2@350,82 334.34,92.66 329,98 ; C25.2@354,106 334,101 321.5,105.5 ; C25.2@359,100 329,98 ; 321.5,105.5 329,98
NetC34_1: C34.1 U3.15 | length 364.1
  Top Layer w8: C34.1@-229.04,-169.92 -203.92,-169.92 ; C34.1@-220,-157 -196,-162 ; C34.1@-219,-162 -196,-162 ; C34.1@-215,-178 -203.92,-169.92 ; C34.1@-214,-183 -196,-162 ; U3.15@-24.36,-25.8 -24.36,-44.36 -27,-47 -81,-47 -196,-162 ; -203.92,-169.92 -196,-162
NetD1_1: D1.1 D3.1 D4.1 R1.1 | length 549.3
  Top Layer w20: D3.1@-544,245 -528.53,206 ; D4.1@-541,132 -528.53,109 ; D4.1@-540,171 -528.53,188 ; D3.1@-539,286 -528.53,307.47 ; R1.1@-528.53,63.89 -528.53,109 ; D1.1@-459,412 -464.5,371.5 ; D1.1@-447.2,426.11 -447.2,388.8 -464.5,371.5 ; -528.53,109 -528.53,188 ; -528.53,188 -528.53,206 ; -528.53,206 -528.53,307.47 ; -528.53,307.47 -464.5,371.5
NetFG_1: FG.1 R28.1 | length 934.6
  Top Layer w8: R28.1@427.19,296.72 R28.1@430.19,296.72
  Top Layer w20: R28.1@430.19,296.72 570.28,296.72 FG.1@762.95,104.05 ; FG.1@762.95,107.3 FG.1@762.95,104.05 ; 847,-23 FG.1@893,-50 ; FG.1@851,-73 836,-7 ; FG.1@870,-98 836,-7 ; FG.1@879,-83 848,-19 ; FG.1@896.27,-67.27 848,-19 ; FG.1@762.95,104.05 762.95,66.05 836,-7 ; 836,-7 848,-19